# Altium PCB Panel_Feeder.PcbDoc
Units mm, origin at the board's own origin, x right, y up, seen from the top; angles counter-clockwise.
Board outline 260 x 260.05 mm, 2 copper layers (Top Layer, Bottom Layer); 19 components, 0 nets, 83 pads, 0 vias.
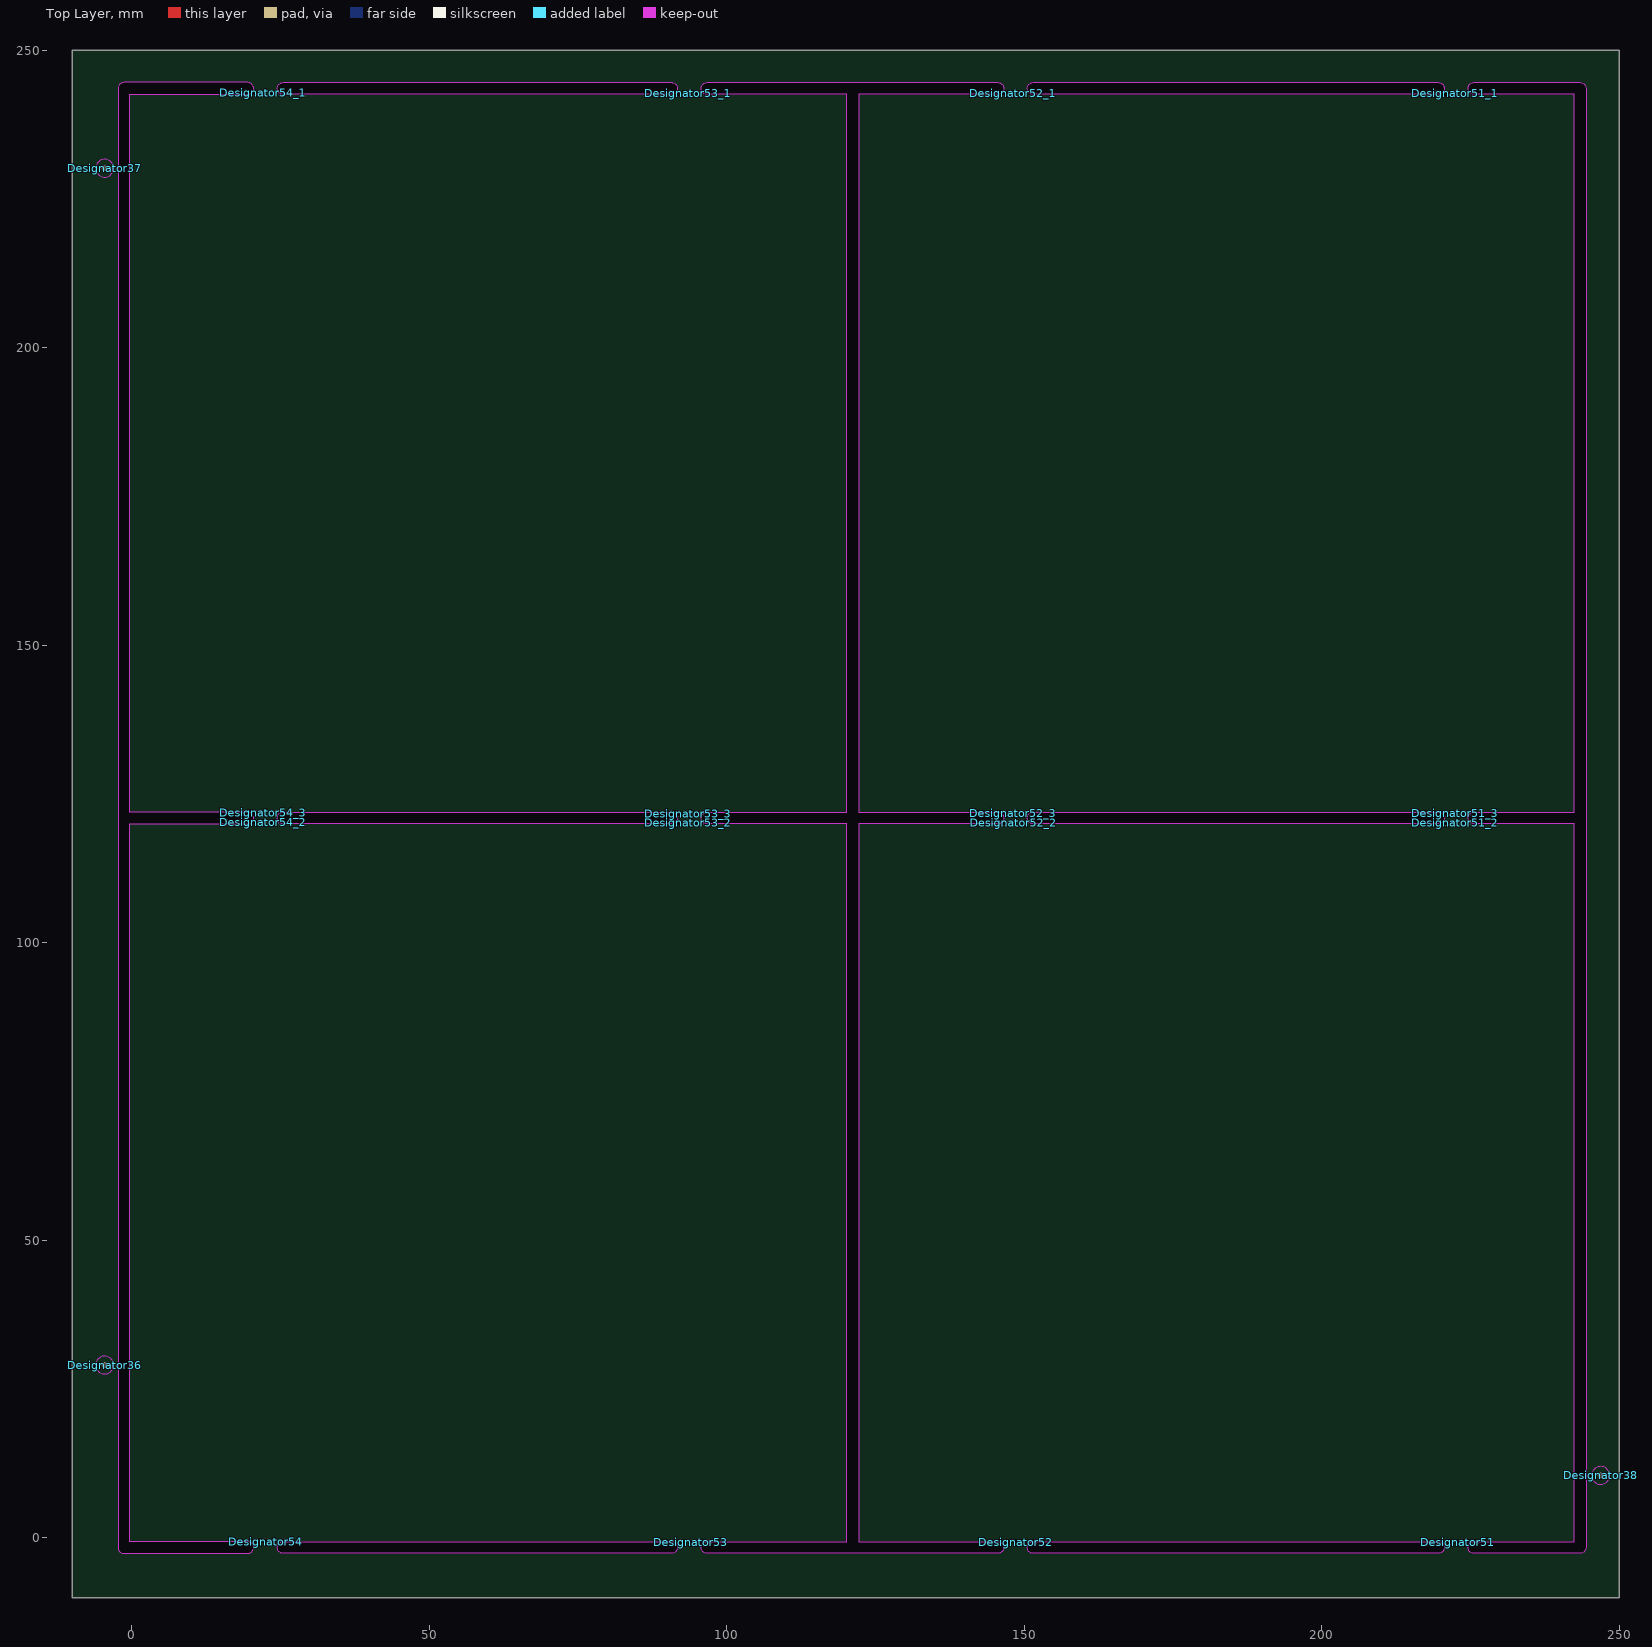
[diagram p0: Top Layer view]
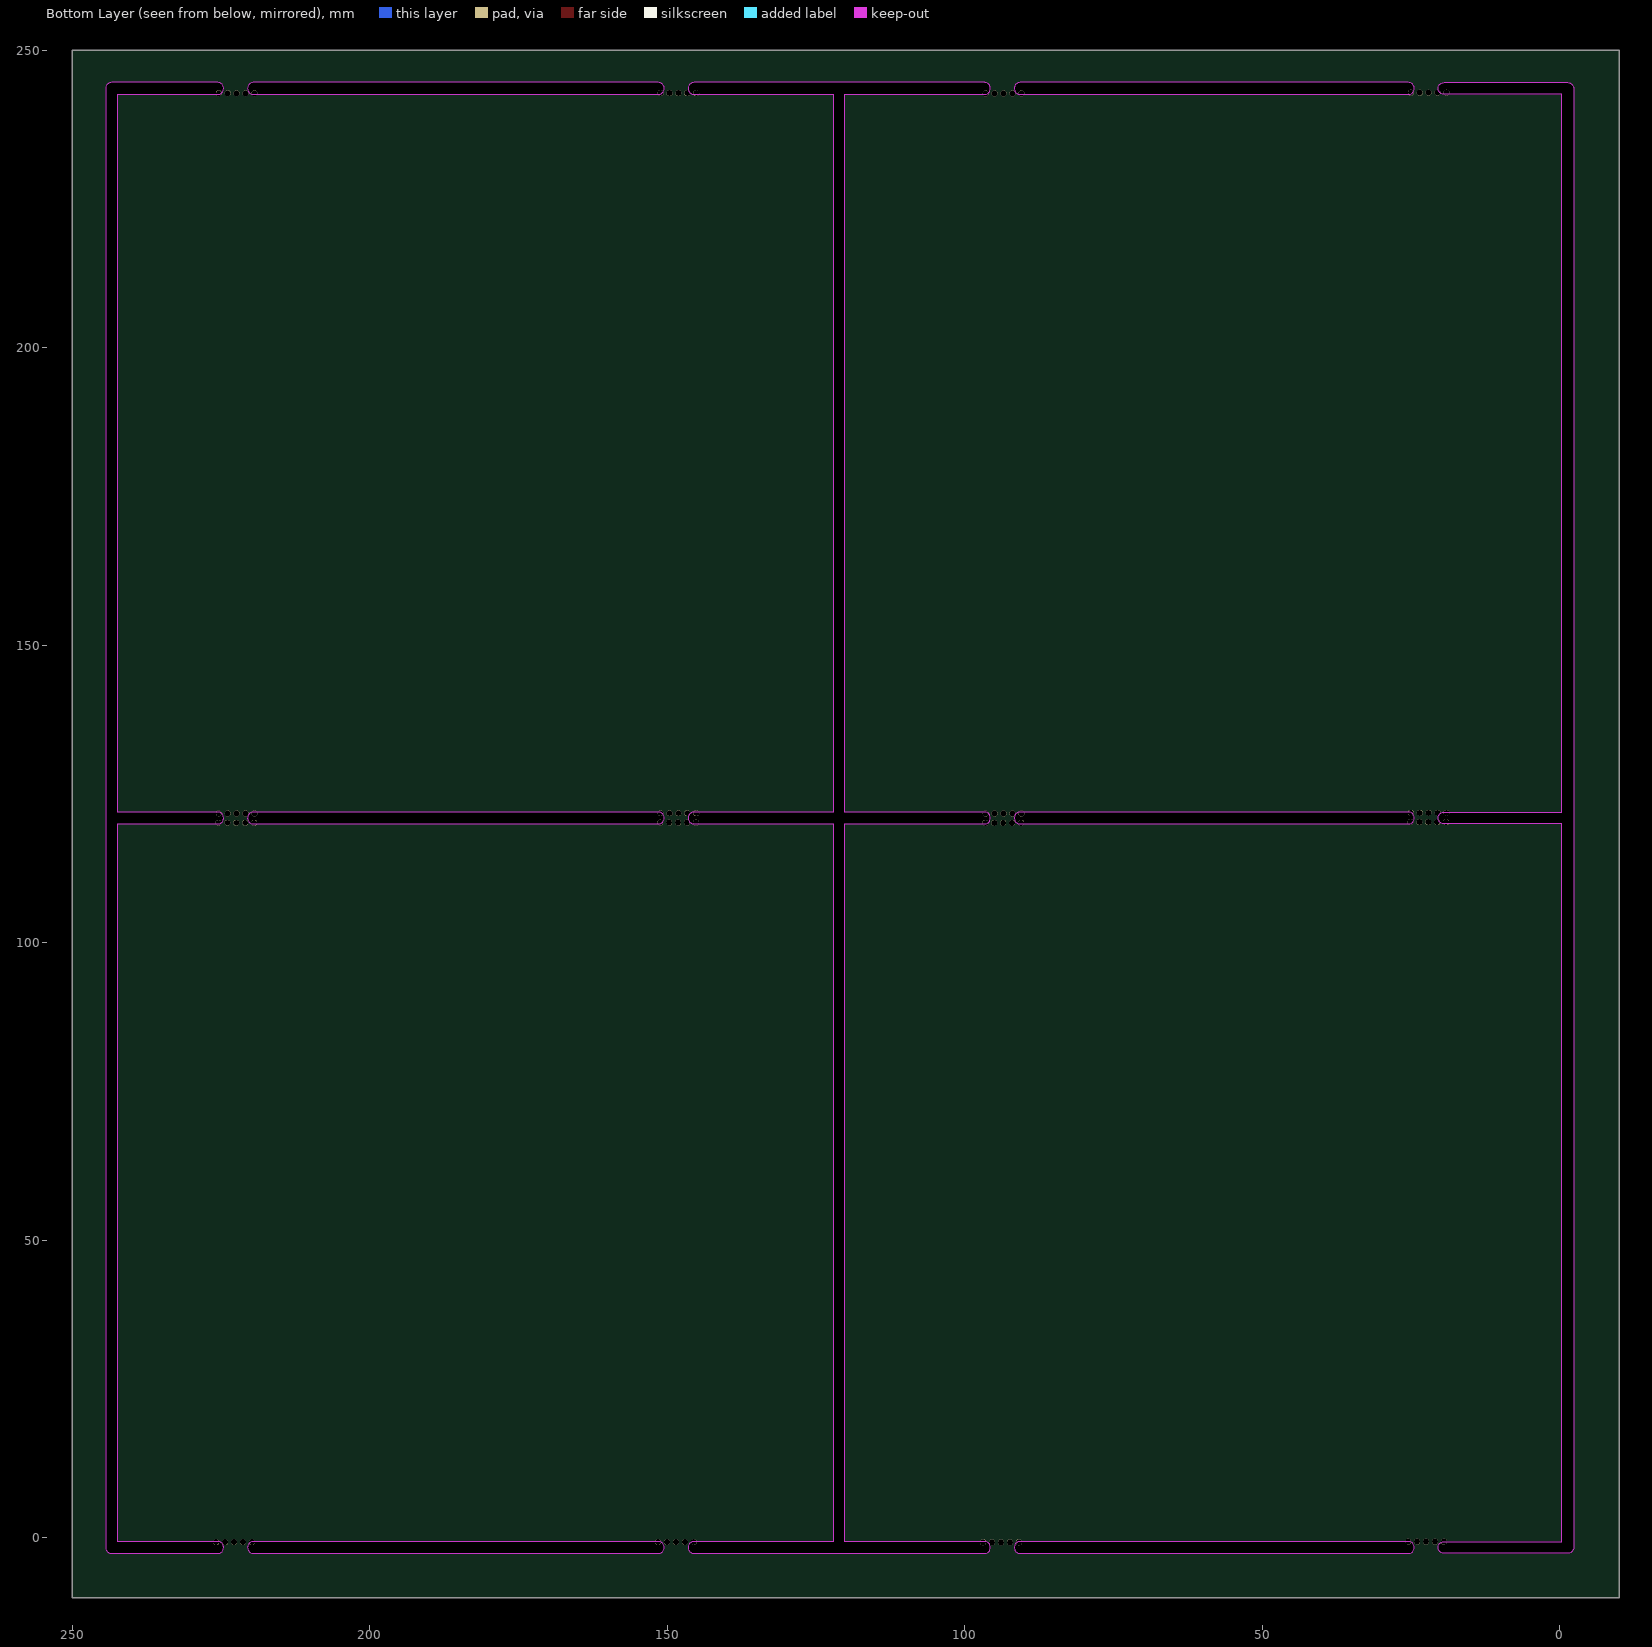
[diagram p1: Bottom Layer view, seen from below]

## Layer stack, top to bottom
Top Solder: solder mask 0.0102, Solder Resist, Dk 3.5
Top Layer: signal copper 0.0356
Dielectric 1: dielectric 0.32, FR-4, Dk 4.8
Bottom Layer: signal copper 0.0356
Bottom Solder: solder mask 0.0102, Solder Resist, Dk 3.5

## Board outline
-10,-10.05 -10,250 250,250 250,-10.05
cut-out: 151.511,242.586 cw(c151.511,243.586) 151.511,244.586 219.558,244.586 cw(c219.558,243.586) 220.558,243.586 cw(c219.558,243.586) 219.558,242.586
cut-out: 25.476,242.586 cw(c25.476,243.586) 25.476,244.586 90.703,244.586 cw(c90.703,243.586) 91.704,243.586 cw(c90.703,243.586) 90.703,242.586
cut-out: 25.476,-2.601 cw(c25.476,-1.6) 25.476,-0.6 90.703,-0.6 cw(c90.703,-1.6) 91.704,-1.6 cw(c90.703,-1.6) 90.703,-2.601
cut-out: 151.511,-2.601 cw(c151.511,-1.6) 151.511,-0.6 219.558,-0.6 cw(c219.558,-1.6) 220.558,-1.6 cw(c219.558,-1.6) 219.558,-2.601
cut-out: 225.552,-2.601 cw(c225.552,-1.6) 225.552,-0.6 242.382,-0.6 242.382,119.98 225.552,119.98 cw(c225.552,120.98) 225.552,121.981 242.382,121.981 242.382,242.586 225.552,242.586 cw(c225.552,243.586) 225.552,244.586 243.383,244.586 cw(c243.383,243.586) 244.383,243.586 244.383,-1.6 cw(c243.383,-1.6) 243.383,-2.601
cut-out: -2.296,-1.6 ccw(c-1.295,-1.6) -1.295,-2.601 19.482,-2.601 ccw(c19.482,-1.6) 20.482,-1.6 ccw(c19.482,-1.6) 19.482,-0.6 -0.295,-0.6 -0.295,119.98 19.482,119.98 ccw(c19.482,120.98) 20.482,120.98 ccw(c19.482,120.98) 19.482,121.981 -0.295,121.981 -0.295,242.586 19.482,242.586 ccw(c19.482,243.586) 20.482,243.586 ccw(c19.482,243.586) 19.482,244.586 -1.295,244.586 ccw(c-1.295,243.586) -2.296,243.586
cut-out: 25.476,119.98 cw(c25.476,120.98) 25.476,121.981 90.703,121.981 cw(c90.703,120.98) 91.704,120.98 cw(c90.703,120.98) 90.703,119.98
cut-out: 151.511,119.98 cw(c151.511,120.98) 151.511,121.981 219.558,121.981 cw(c219.558,120.98) 220.558,120.98 cw(c219.558,120.98) 219.558,119.98
cut-out: 96.698,-0.6 120.158,-0.6 120.158,119.98 96.698,119.98 cw(c96.698,120.98) 96.698,121.981 120.158,121.981 120.158,242.586 96.698,242.586 cw(c96.698,243.586) 96.698,244.586 145.517,244.586 cw(c145.517,243.586) 146.517,243.586 cw(c145.517,243.586) 145.517,242.586 122.158,242.586 122.158,121.981 145.517,121.981 cw(c145.517,120.98) 146.517,120.98 cw(c145.517,120.98) 145.517,119.98 122.158,119.98 122.158,-0.6 145.517,-0.6 cw(c145.517,-1.6) 146.517,-1.6 cw(c145.517,-1.6) 145.517,-2.601 96.698,-2.601 cw(c96.698,-1.6)

## Design rules (kind name [scope] priority, off if disabled: settings)
Clearance [All] p1: gap=0.254 ignorepadtopadclearanceinfootprint=FALSE except(0: Arc-Hole Track-Hole SMDPad-Hole THPad-Hole Via-Hole Fill-Hole Poly-Hole Region-Hole Text-Hole)
PolygonConnect [All] p1: connectstyle=Relief reliefconductorwidth=0.254 reliefentries=4 polygonreliefangle="90 Angle" airgapwidth=0.254
RoutingVias [All] p1: holewidth=0.2 width=0.4 viastyle="Through Hole" minholewidth=0.2 minwidth=0.4 maxholewidth=0.8 maxwidth=0.8
SolderMaskExpansion [All] p1: expansion=0.102 istentingtop=FALSE
Width [All] p1: maxlimit=0.254 minlimit=0.254 preferedwidth=0.254
30 further rules are at their usual default settings.

## Components (designator, comment, footprint, x,y, rotation, side; value= is the part's Value field where it differs from the comment)
Designator36 "Comment" FUDICIAL_MARKER -4.572,29.058 r0 top
Designator37 "Comment" FUDICIAL_MARKER -4.572,230.175 r0 top
Designator38 "Comment" FUDICIAL_MARKER 246.837,10.516 r0 top
Designator51 "Comment" "Stamp Hole" 219.809,-0.711 r0 top
Designator51_1 "Comment" "Stamp Hole" 219.379,242.764 r0 top
Designator51_2 "Comment" "Stamp Hole" 219.43,120.184 r0 top
Designator51_3 "Comment" "Stamp Hole" 219.379,121.758 r0 top
Designator52 "Comment" "Stamp Hole" 145.565,-0.686 r0 top
Designator52_1 "Comment" "Stamp Hole" 145.135,242.789 r0 top
Designator52_2 "Comment" "Stamp Hole" 145.185,120.209 r0 top
Designator52_3 "Comment" "Stamp Hole" 145.135,121.784 r0 top
Designator53 "Comment" "Stamp Hole" 90.929,-0.737 r0 top
Designator53_1 "Comment" "Stamp Hole" 90.499,242.739 r0 top
Designator53_2 "Comment" "Stamp Hole" 90.55,120.158 r0 top
Designator53_3 "Comment" "Stamp Hole" 90.499,121.733 r0 top
Designator54 "Comment" "Stamp Hole" 19.504,-0.61 r0 top
Designator54_1 "Comment" "Stamp Hole" 19.074,242.866 r0 top
Designator54_2 "Comment" "Stamp Hole" 19.125,120.285 r0 top
Designator54_3 "Comment" "Stamp Hole" 19.074,121.86 r0 top

## Footprints (in the part's own frame and the unit in brackets; to place one, negate y for a bottom-side part, rotate by r counter-clockwise, add the part's x,y. Pads: shape width x height; smd on the part's side, far side on the other; paste and mask are expansions set on the pad)
FUDICIAL_MARKER [mm]
  round 1 smd paste-1 mask+1: 4(0,0)
  Top Layer pour cut-out: 0.622,1.511 1.5,0.634 1.5,-0.634 0.622,-1.511 -0.622,-1.511 -1.511,-0.622 -1.511,0.622 -0.622,1.511
  Top Layer keep-out circle w0.01: c0,0 r1.5
"Stamp Hole" [mm]
  round 1 hole 1 mask+0.102: 5(0,0) 5(1.5,0) 5(3,0) 5(4.5,0) 5(6,0)

## Nets (pads, with @x,y where several pads share a name; then routed paths per layer and width w, separated by ;. In a path a pad name is that pad's centre, name@x,y a point inside that pad or via, vN(x,y) a via of type N, cw(c..) or ccw(c..) an arc to the next point about the centre after c; other vN are vias at no path point)
pads on no net: Designator36.4 Designator37.4 Designator38.4 Designator51.5 Designator51_1.5 Designator51_2.5 Designator51_3.5 Designator52.5 Designator52_1.5 Designator52_2.5 Designator52_3.5 Designator53.5 Designator53_1.5 Designator53_2.5 Designator53_3.5 Designator54.5 Designator54_1.5 Designator54_2.5 Designator54_3.5

## Silkscreen, mask and mechanical layers (free items; w line width, h text height)
Mechanical 1:
  lines w0.254: -10,-10.05 -10,250 250,250 250,-10.05 -10,-10.05
  lines w2: -0.94,120.98 19.482,120.98 ; 19.482,-1.6 -1.295,-1.6 -1.295,243.586 19.482,243.586 ; 25.476,-1.6 90.703,-1.6 ; 25.476,120.98 90.703,120.98 ; 25.476,243.586 90.703,243.586 ; 96.698,-1.6 145.517,-1.6 ; 96.698,120.98 145.517,120.98 ; 96.698,243.586 145.517,243.586 ; 121.158,-1.194 121.158,243.23 ; 151.511,-1.6 219.558,-1.6 ; 151.511,120.98 219.558,120.98 ; 151.511,243.586 219.558,243.586 ; 225.552,-1.6 243.383,-1.6 243.383,243.586 225.552,243.586 ; 225.552,120.98 242.799,120.98

## Panel: embedded boards
"PCB2.PcbDoc" at -0.006,-0.009, 2 rows x 2 columns, spacing 122 x 122, rotation 0